# Altium PCB PCB1.PcbDoc (part 4 of 4)
Units mm, origin at the board's own origin, x right, y up, seen from the top; angles counter-clockwise.
Board outline 100.03 x 99.98 mm, 4 copper layers (Top Layer, Layer 2, Layer 3, Bottom Layer), stack 0.603 mm thick; 139 components, 135 nets, 1369 pads, 401 vias.
Unrouted connection lines stored in the file: 1.
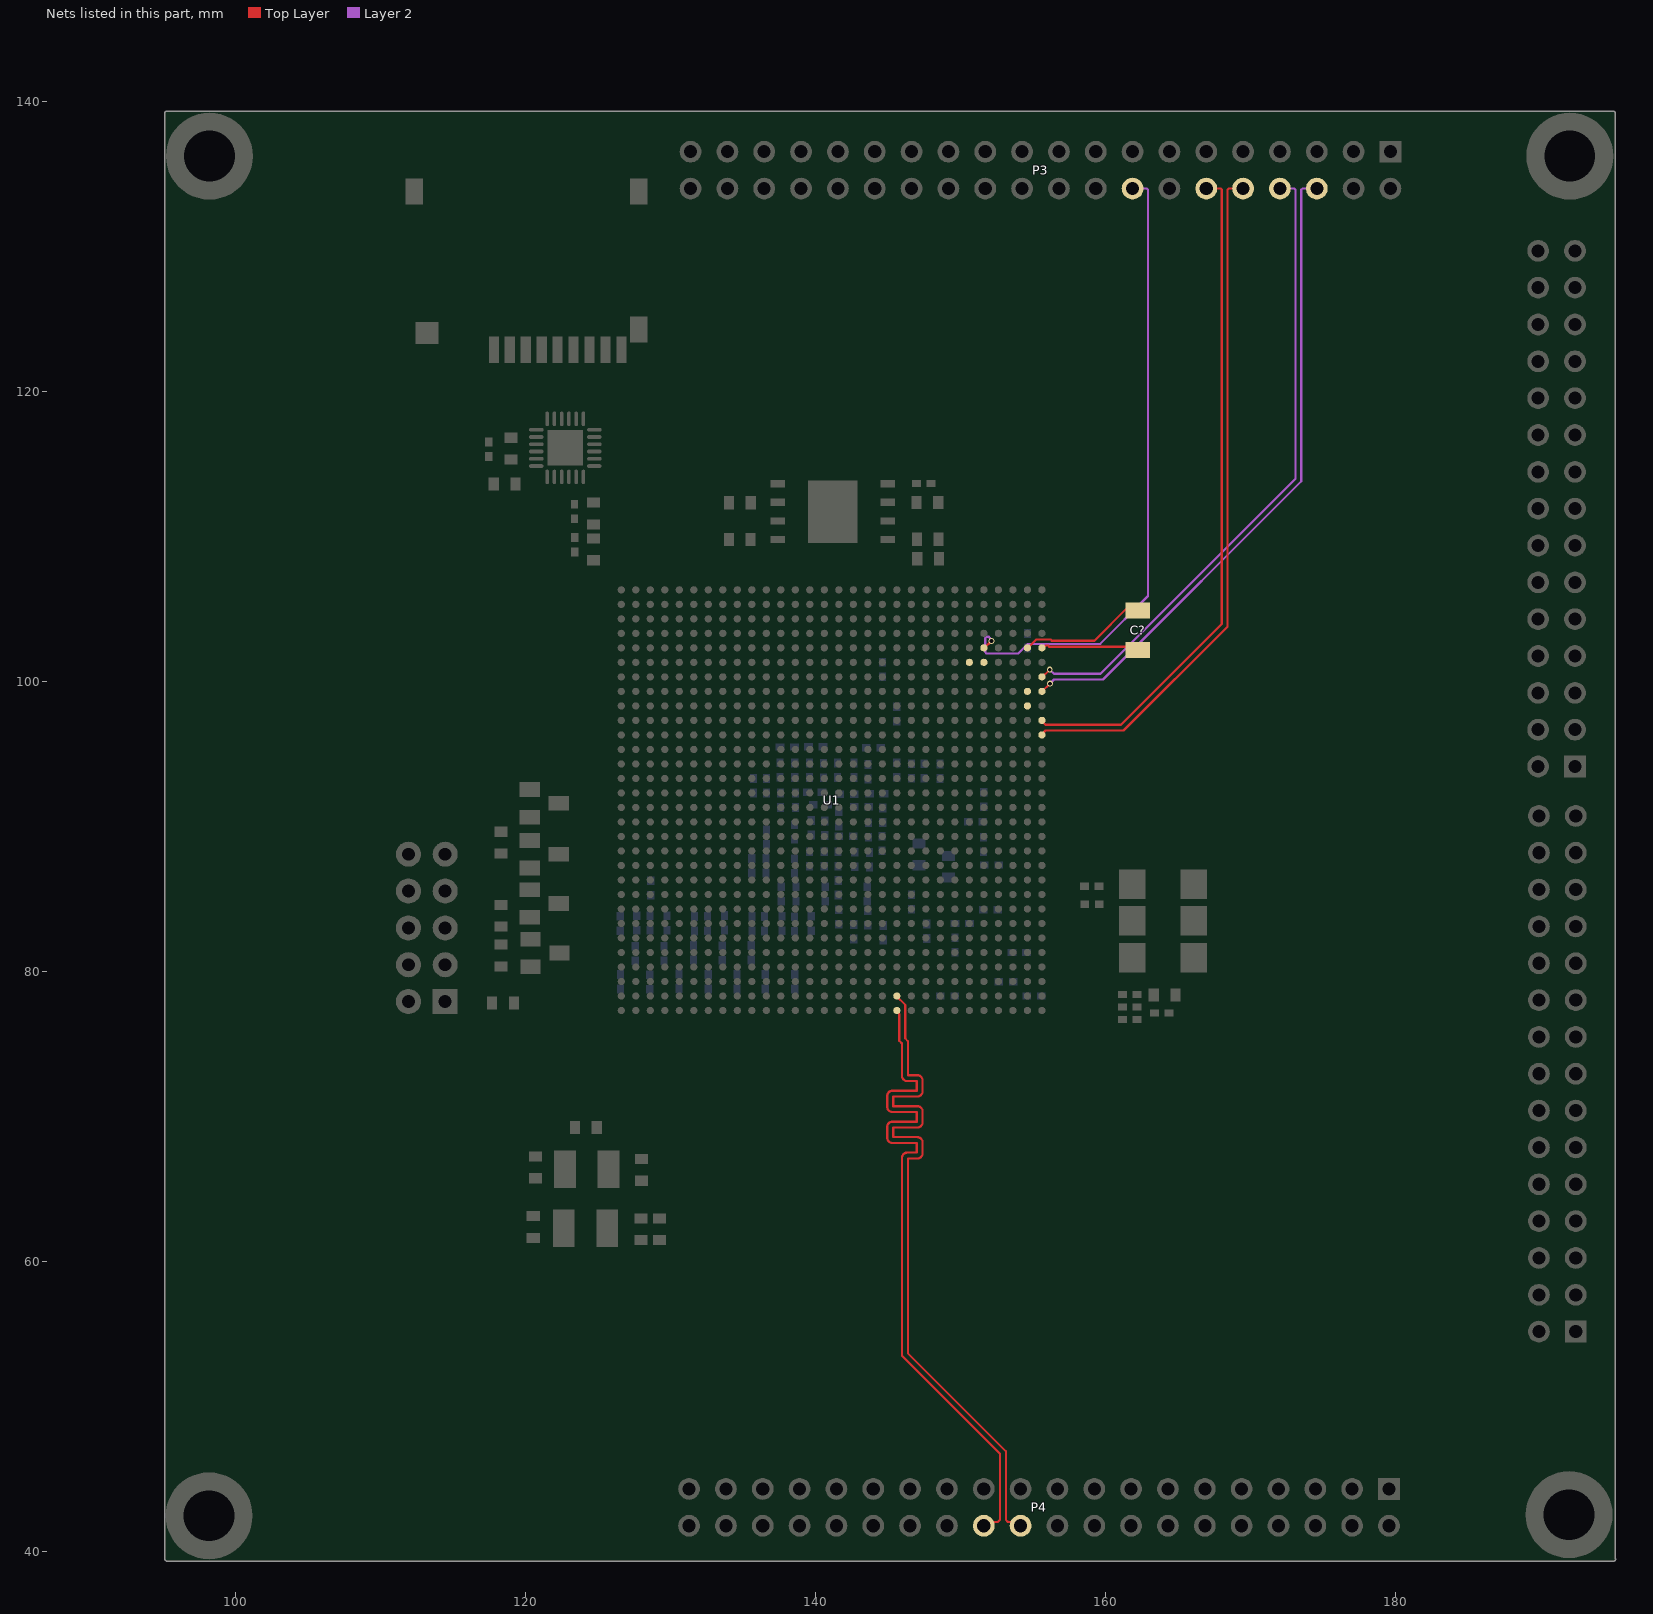
[diagram p6: the nets of this part, all layers, seen from the top]

## Via types
v1: diameter 0.406, hole 0.254, Top Layer to Bottom Layer, 401 vias

## Nets (pads, with @x,y where several pads share a name; then routed paths per layer and width w, separated by ;. In a path a pad name is that pad's centre, name@x,y a point inside that pad or via, vN(x,y) a via of type N, cw(c..) or ccw(c..) an arc to the next point about the centre after c; other vN are vias at no path point) (continued)
X8_P: P3.16 U1.AF26 | length 44.3
  Top Layer w0.152: U1.AF26@151.62,102.314 151.666,102.314 v1(152.146,102.794)
  Layer 2 w0.152: v1(152.146,102.794) 152.146,102.863 152.043,102.966 152.043,102.997 151.954,103.086 151.827,103.086 151.714,102.973 151.714,102.019 151.803,101.93 153.994,101.93 154.655,102.591 159.639,102.591 162.941,105.893 162.941,133.896 162.852,133.985 P3.16@161.874,133.985
X9_N: C?.2 U1.AJ26 | length 8.2
  Top Layer w0.152: U1.AJ26@154.62,102.314 154.663,102.314 155.235,102.886 156.216,102.886 156.301,102.802 159.241,102.802 C?.2@161.582,105.143
X9_P: C?.1 U1.AK26 | length 6.9
  Top Layer w0.152: U1.AK26@155.62,102.314 155.714,102.314 155.88,102.48 156.048,102.48 156.132,102.395 C?.1@162.433,102.395
X10_N: U1.AF25
X10_P: U1.AE25
X11_N: P3.8 U1.AK24 | length 44.4
  Top Layer w0.152: U1.AK24@155.62,100.314 155.661,100.314 v1(156.159,100.813)
  Layer 2 w0.152: v1(156.159,100.813) 156.172,100.813 156.451,100.533 159.664,100.533 173.101,113.97 173.101,133.896 173.012,133.985 P3.8@172.034,133.985
X11_P: P3.6 U1.AK23 | length 45.1
  Top Layer w0.152: U1.AK23@155.62,99.314 155.651,99.314 v1(156.185,99.847)
  Layer 2 w0.152: v1(156.185,99.847) 156.185,99.86 156.451,100.127 159.833,100.127 173.507,113.801 173.507,133.896 173.597,133.985 P3.6@174.574,133.985
X12_N: U1.AJ23
X12_P: U1.AJ22
X13_N: P3.12 U1.AK21 | length 46.5
  Top Layer w0.152: U1.AK21@155.62,97.314 155.62,97.271 155.874,97.017 161.076,97.017 168.021,103.962 168.021,133.896 167.932,133.985 P3.12@166.954,133.985
X13_P: P3.10 U1.AK20 | length 47.1
  Top Layer w0.152: U1.AK20@155.62,96.314 155.62,96.357 155.874,96.611 161.244,96.611 168.427,103.794 168.427,133.896 168.517,133.985 P3.10@169.494,133.985
Y1_N: P4.24 U1.Y1 | length 48.6
  Top Layer w0.152: U1.Y1@145.62,77.314 145.62,77.22 145.786,77.054 145.786,75.219 145.974,75.032 145.974,72.804 ccw(c146.337,72.804) 146.337,72.441 146.99,72.441 146.99,71.78 145.321,71.78 ccw(c145.321,71.417) 144.958,71.417 144.958,70.67 ccw(c145.321,70.67) 145.321,70.307 146.99,70.307 146.99,69.647 145.321,69.647 ccw(c145.321,69.284) 144.958,69.284 144.958,68.537 ccw(c145.321,68.537) 145.321,68.174 146.99,68.174 146.99,67.513 146.337,67.513 ccw(c146.337,67.15) 145.974,67.15 145.974,53.502 152.73,46.745 152.73,42.189 152.582,42.041 151.87,42.041 P4.24@151.613,41.783
Y1_P: P4.22 U1.Y2 | length 49.6
  Top Layer w0.152: U1.Y2@145.62,78.314 145.62,78.271 146.192,77.699 146.192,77.054 146.192,75.388 146.38,75.2 146.38,72.847 147.033,72.847 cw(c147.033,72.484) 147.396,72.484 147.396,71.737 cw(c147.033,71.737) 147.033,71.374 145.364,71.374 145.364,70.714 147.033,70.714 cw(c147.033,70.35) 147.396,70.35 147.396,69.604 cw(c147.033,69.604) 147.033,69.24 145.364,69.24 145.364,68.58 147.033,68.58 cw(c147.033,68.217) 147.396,68.217 147.396,67.47 cw(c147.033,67.47) 147.033,67.107 146.38,67.107 146.38,53.67 153.137,46.914 153.137,42.189 153.285,42.041 153.895,42.041 P4.22@154.153,41.783
pads on no net: J1.7 J1.8 P4.29 P4.31 P4.33 P4.34 P4.35 P4.36 P4.37 P4.38 P4.39 P4.40 U1.A3 U1.A4 U1.A7 U1.A8 U1.A11 U1.A12 U1.A13 U1.A15 U1.A16 U1.A17 U1.A18 U1.A23 U1.AA3 U1.AA4 U1.AA8 U1.AA10 U1.AA11 U1.AA12 U1.AA13 U1.AA15 U1.AA16 U1.AA17 U1.AA18 U1.AA20 U1.AA21 U1.AA22 U1.AA23 U1.AA25 U1.AA26 U1.AA28 U1.AB7 U1.AB8 U1.AB9 U1.AB10 U1.AB12 U1.AB13 U1.AB14 U1.AB15 U1.AB17 U1.AB18 U1.AB19 U1.AB20 U1.AB22 U1.AB23 U1.AB24 U1.AB25 U1.AB27 U1.AB29 U1.AB30 U1.AC4 U1.AC5 U1.AC6 U1.AC7 U1.AC9 U1.AC10 U1.AC11 U1.AC12 U1.AC14 U1.AC15 U1.AC16 U1.AC17 U1.AC19 U1.AC20 U1.AC21 U1.AC22 U1.AC24 U1.AC25 U1.AC26 U1.AC27 U1.AD6 U1.AD8 U1.AD9 U1.AD11 U1.AD12 U1.AD14 U1.AD16 U1.AD17 U1.AD18 U1.AD19 U1.AD21 U1.AD22 U1.AD23 U1.AD24 U1.AD26 U1.AD27 U1.AD28 U1.AD29 U1.AE5 U1.AE6 U1.AE8 U1.AE9 U1.AE11 U1.AE13 U1.AE15 U1.AE16 U1.AE18 U1.AE19 U1.AE20 U1.AE21 U1.AE23 U1.AE24 U1.AE26 U1.AE28 U1.AE29 U1.AF5 U1.AF6 U1.AF7 U1.AF8 U1.AF11 U1.AF12 U1.AF13 U1.AF15 U1.AF17 U1.AF18 U1.AF20 U1.AF21 U1.AF22 U1.AF23 U1.AF28 U1.AG3 U1.AG4 U1.AG5 U1.AG7 U1.AG9 U1.AG10 U1.AG12 U1.AG13 U1.AG14 U1.AG15 U1.AG17 U1.AG18 U1.AG19 U1.AG20 U1.AG22 U1.AG23 U1.AG24 U1.AG25 U1.AG27 U1.AG28 U1.AG29 U1.AH4 U1.AH5 U1.AH6 U1.AH7 U1.AH9 U1.AH10 U1.AH11 U1.AH12 U1.AH14 U1.AH15 U1.AH16 U1.AH17 U1.AH19 U1.AH20 U1.AH21 U1.AH22 U1.AH24 U1.AH25 U1.AH29 U1.AJ4 U1.AJ6 U1.AJ7 U1.AJ8 U1.AJ9 U1.AJ11 U1.AJ12 U1.AJ13 U1.AJ14 U1.AJ16 U1.AJ17 U1.AJ21 U1.AJ24 U1.AJ27 U1.AK4 U1.AK5 U1.AK6 U1.AK8 U1.AK9 U1.AK10 U1.AK11 U1.AK13 U1.AK14 U1.AK25 U1.AK28 U1.B1 U1.B2 U1.B5 U1.B6 U1.B12 U1.B13 U1.B14 U1.B15 U1.B17 U1.B18 U1.B19 U1.B20 U1.B23 U1.B24 U1.B25 U1.B27 U1.C3 U1.C4 U1.C7 U1.C8 U1.C11 U1.C12 U1.C14 U1.C15 U1.C16 U1.C17 U1.C19 U1.C20 U1.C21 U1.C22 U1.C24 U1.C25 U1.C26 U1.C27 U1.C30 U1.D1 U1.D2 U1.D5 U1.D6 U1.D11 U1.D12 U1.D13 U1.D14 U1.D16 U1.D17 U1.D18 U1.D19 U1.D21 U1.D22 U1.D23 U1.D24 U1.D26 U1.D27 U1.D28 U1.D29 U1.E3 U1.E4 U1.E7 U1.E8 U1.E11 U1.E13 U1.E14 U1.E15 U1.E16 U1.E18 U1.E19 U1.E20 U1.E21 U1.E23 U1.E24 U1.E25 U1.E26 U1.E28 U1.F1 U1.F2 U1.F5 U1.F6 U1.F11 U1.F12 U1.F13 U1.F15 U1.F16 U1.F17 U1.F18 U1.F20 U1.F21 U1.F22 U1.F23 U1.F25 U1.F26 U1.F27 U1.F28 U1.F30 U1.G3 U1.G4 U1.G7 U1.G8 U1.G12 U1.G13 U1.G14 U1.G15 U1.G17 U1.G18 U1.G19 U1.G20 U1.G22 U1.G23 U1.G24 U1.G25 U1.G27 U1.G28 U1.G29 U1.G30 U1.H1 U1.H2 U1.H5 U1.H6 U1.H11 U1.H12 U1.H14 U1.H15 U1.H16 U1.H17 U1.H19 U1.H20 U1.H21 U1.H22 U1.H24 U1.H25 U1.H26 U1.H27 U1.H29 U1.H30 U1.J3 U1.J4 U1.J7 U1.J8 U1.J11 U1.J12 U1.J13 U1.J14 U1.J16 U1.J17 U1.J18 U1.J19 U1.J21 U1.J22 U1.J23 U1.J24 U1.J26 U1.J27 U1.J28 U1.J29 U1.K1 U1.K2 U1.K5 U1.K6 U1.K11 U1.K13 U1.K14 U1.K15 U1.K16 U1.K18 U1.K19 U1.K20 U1.K21 U1.K23 U1.K24 U1.K25 U1.K26 U1.K28 U1.K29 U1.K30 U1.L3 U1.L4 U1.L7 U1.L8 U1.L11 U1.L12 U1.L13 U1.L15 U1.L16 U1.L17 U1.L18 U1.L20 U1.L21 U1.L22 U1.L23 U1.L25 U1.L26 U1.L27 U1.L28 U1.L30 U1.M1 U1.M2 U1.M5 U1.M6 U1.M19 U1.M20 U1.M22 U1.M23 U1.M24 U1.M25 U1.M27 U1.M28 U1.M29 U1.M30 U1.N3 U1.N4 U1.N7 U1.N8 U1.N19 U1.N20 U1.N21 U1.N22 U1.N24 U1.N25 U1.N26 U1.N27 U1.N29 U1.N30 U1.P5 U1.P6 U1.P19 U1.P21 U1.P22 U1.P23 U1.P26 U1.P27 U1.P28 U1.P29 U1.R7 U1.R8 U1.R15 U1.R19 U1.R24 U1.R26 U1.R28 U1.R29 U1.R30 U1.T5 U1.T6 U1.T14 U1.T20 U1.T21 U1.T22 U1.T23 U1.T25 U1.T26 U1.T27 U1.T28 U1.T30 U1.U7 U1.U8 U1.U20 U1.U22 U1.U23 U1.U24 U1.U25 U1.U27 U1.U28 U1.V5 U1.V6 U1.V19 U1.V20 U1.V21 U1.V22 U1.V24 U1.V25 U1.V26 U1.V27 U1.V29 U1.V30 U1.W3 U1.W4 U1.W7 U1.W8 U1.W19 U1.W21 U1.W22 U1.W23 U1.W24 U1.W26 U1.W27 U1.W28 U1.Y5 U1.Y6 U1.Y10 U1.Y11 U1.Y14 U1.Y15 U1.Y16 U1.Y18 U1.Y19 U1.Y20 U1.Y21 U1.Y23 U1.Y24 U1.Y25 U1.Y26 U1.Y28 U2.9 U3.8 U3.10 U3.12 U3.13 U3.14 U3.15 X1.2

## Polygon pours and split planes (outlines as drawn)
no net on Layer 3 "Layer 3-No Net" (solid, pour order 97): 95.25,139.192 95.25,39.497 95.26,39.477 95.28,39.456 95.301,39.446 195.047,39.446 195.072,39.472 195.067,39.487 195.047,39.548 195.047,139.192 195.021,139.218 111.481,139.218 111.481,135.026 101.93,135.026 101.93,139.218 95.275,139.218
DIMM_VCCO on Layer 3 "Layer 3-DIMM_VCCO" (solid, pour order 85): 195.123,123.546 195.123,130.759 127.991,130.759 125.578,128.346 125.578,124.409 132.029,124.409 132.893,123.546
MGTAVCC on Layer 3 "Layer 3-MGTAVCC" (solid, pour order 78): 126.642,82.683 126.136,82.177 126.136,68.885 169.799,68.885 177.47,76.556 195.148,76.556 195.148,69.418 195.097,69.367 195.072,69.393 179.426,69.393 176.327,66.294 124.485,66.294 123.825,66.954 123.825,81.458 125.73,83.363 126.659,83.363
MGTAVTT on Layer 3 "Layer 3-MGTAVTT" (solid, pour order 77): 145.644,78.334 145.644,75.59 145.618,75.565 162.966,75.565 171.501,84.099 195.123,84.099 195.123,76.937 195.021,76.835 177.292,76.835 169.57,69.113 126.365,69.113 126.365,81.218
no net on Layer 3 "Layer 3-No Net 1" (solid, pour order 76): 145.644,78.334
+1.5V on Layer 3 "Layer 3-+1.5V" (solid, pour order 75): 149.835,92.024 157.734,92.024 157.759,92.05 195.123,92.05 195.097,92.024 195.097,84.404 149.835,84.404
+1.0V on Layer 3 "Layer 3-+1.0V" (solid, pour order 74): 145.459,95.301 163.398,95.301 163.424,95.326 182.88,95.326 187.858,100.305 195.072,100.305 195.072,92.888 188.57,92.888 188.544,92.913 187.909,92.278 145.434,92.278
VADJ on Layer 3 "Layer 3-VADJ" (solid, pour order 72): 150.419,107.163 150.419,113.208 152.705,115.494 195.123,115.494 195.123,108.204 157.378,108.204 155.626,106.451 155.626,105.816 151.765,105.816
+3.3V on Layer 3 "Layer 3-+3.3V" (solid, pour order 71): 133.579,106.909 133.604,106.934 133.604,123.215 133.68,123.292 194.996,123.292 194.996,115.824 145.618,115.824 145.618,107.198 145.355,106.934 133.579,106.934
DIMM_VCCO on Layer 3 "Layer 3-DIMM_VCCO 1" (solid, pour order 70): 125.527,107.29 125.527,85.293 136.423,85.293 136.423,95.936 136.398,95.961 133.375,95.961 133.375,107.29
+1.5V on Layer 3 "Layer 3-+1.5V 1" (solid, pour order 69): 145.923,91.999 145.923,75.768 156.337,75.768 156.337,91.999
VADJ on Layer 3 "Layer 3-VADJ 1" (solid, pour order 68): 144.882,96.596 156.413,96.596 156.413,107.239 145.847,107.239 145.847,106.782 145.847,96.114
+3.3V on Layer 3 "Layer 3-+3.3V 1" (solid, pour order 67): 133.579,107.239 133.579,96.139 145.644,96.139 145.644,107.239
+1.8V on Layer 3 "Layer 3-+1.8V" (solid, pour order 66): 138.735,88.443 138.735,89.23 138.684,89.281 138.709,89.306 143.637,89.306 143.637,91.313 145.72,91.313 145.72,85.344 143.815,85.344 143.815,88.367 138.811,88.367
no net on Layer 3 "Layer 3-No Net 2" (solid, pour order 65): 138.684,89.281
+1.0V on Layer 3 "Layer 3-+1.0V 1" (solid, pour order 64): 136.576,95.301 136.576,85.344 143.662,85.344 143.637,85.369 143.637,88.316 141.63,88.316 138.608,88.316 138.608,92.278 145.618,92.278 145.644,92.304 145.644,95.301
MGTAVCC on Layer 3 "Layer 3-MGTAVCC 1" (solid, pour order 63): 126.314,83.363 126.314,82.321 140.589,82.321 140.564,82.347 140.564,83.337 126.695,83.337 126.67,83.363
MGTAVTT on Layer 3 "Layer 3-MGTAVTT 1" (solid, pour order 62): 126.289,78.359 126.263,78.334 145.644,78.334 145.644,82.22 126.289,82.22
no net on Layer 2 "Layer 2-No Net" (solid, pour order 99): 95.25,139.192 95.25,39.497 95.26,39.477 95.28,39.456 95.301,39.446 195.047,39.446 195.072,39.472 195.067,39.487 195.047,39.548 195.047,139.192 195.021,139.218 105.226,139.218 95.275,139.218
GND on Layer 2 "Layer 2-GND" (solid, pour order 91): 95.174,139.319 101.6,139.319 101.6,134.925 101.829,134.696 112.293,134.696 112.522,134.925 112.522,139.319 195.148,139.319 195.148,39.37 95.174,39.37
GND on Top Layer "Top Layer-GND" (solid, remove dead copper, pour order 93): 95.25,139.192 95.25,39.497 95.26,39.477 95.28,39.456 95.301,39.446 195.047,39.446 195.072,39.472 195.067,39.487 195.047,39.548 195.047,139.192 195.021,139.218 111.481,139.218 111.481,135.026 101.93,135.026 101.93,139.218 95.275,139.218
GND on Bottom Layer "Bottom Layer-GND" (solid, pour order 95): 95.25,139.192 95.25,39.497 95.26,39.477 95.28,39.456 95.301,39.446 195.047,39.446 195.072,39.472 195.067,39.487 195.047,39.548 195.047,139.192 195.021,139.218 111.481,139.218 111.481,135.026 101.93,135.026 101.93,139.218 95.275,139.218

## Other copper
Top Layer:
  pour cut-out: 160.731,87.351 160.731,79.654 160.757,79.629 167.234,79.629 167.259,79.604 167.259,87.351
  pour cut-out: 137.236,114.706 137.236,108.737 145.186,108.737 145.186,114.681 137.262,114.681
  pour cut-out: 120.167,118.72 120.167,112.852 125.374,112.852 125.4,112.878 125.4,118.694 125.374,118.72
  pour cut-out: 125.4,107.544 125.273,107.417 125.273,75.895 156.972,75.895 156.972,107.747 152.476,107.747
  pour cut-out: 125.4,107.544
  text "1" at 102.845,135.839 h2
Layer 2:
  pour cut-out: 101.93,139.218 101.93,135.026 112.217,135.026 112.217,139.218
  pour cut-out: 91.059,143.231 89.052,141.224 91.008,143.18
  pour cut-out: 99.035,142.596
  text "2" at 104.75,135.941 h2
Layer 3:
  rectangle net DIMM_VCCO: 126.467,107.01 133.375,125.095
  pour cut-out: 107.34,136.652
  text "3" at 107.366,135.941 h2
Bottom Layer:
  pour cut-out: 125.298,107.594 125.298,100.127 125.273,100.101 125.298,100.076 125.298,76.073 125.324,76.048 156.947,76.048 156.947,107.42 157.091,107.564 157.06,107.594 125.425,107.594 125.324,107.696
  text "4" at 109.499,135.89 h2

## Silkscreen, mask and mechanical layers (free items; w line width, h text height)
Top Overlay:
  lines w0.254: 130.023,45.593 130.023,58.395 ; 130.023,51.994 180.746,51.994 ; 130.023,58.522 180.797,58.522 180.797,45.568 ; 130.124,128.118 180.848,128.118 ; 130.124,132.715 130.124,123.317 130.2,123.241 180.899,123.241 180.924,123.266 180.924,132.715 ; 132.537,40.564 132.537,58.496 ; 132.639,123.292 132.639,132.715 ; 135.103,40.589 135.103,58.42 ; 135.179,123.342 135.179,137.744 ; 137.643,40.589 137.643,58.471 ; 137.744,123.292 137.744,132.715 ; 140.183,40.615 140.183,58.496 ; 140.284,123.317 140.284,137.77 ; 142.748,40.64 142.748,58.522 ; 142.799,123.368 142.799,132.69 ; 145.288,40.615 145.288,58.496 ; 145.39,123.292 145.39,137.719 ; 147.803,40.589 147.803,58.471 ; 147.904,123.241 147.904,132.715 ; 150.368,40.589 150.368,58.471 ; 150.495,123.292 150.495,137.668 ; 152.959,40.589 152.959,58.471 ; 152.959,123.266 152.959,132.69 ; 155.423,40.564 155.423,58.445 ; 155.524,123.266 155.524,137.795 ; 157.963,40.538 157.963,58.42 ; 158.064,123.368 158.064,132.715 ; 160.452,40.64 160.452,58.522 ; 160.655,123.419 160.655,137.744 ; 163.068,40.64 163.068,58.522 ; 163.144,123.342 163.144,132.715 ; 165.532,40.615 165.532,58.496 ; 165.659,123.266 165.659,137.719 ; 168.123,40.589 168.123,58.471 ; 168.199,123.368 168.199,132.715 ; 170.688,40.564 170.688,58.445 ; 170.764,123.317 170.764,137.719 ; 173.279,40.615 173.279,58.496 ; 173.304,123.419 173.304,132.69 ; 175.768,40.615 175.768,58.496 ; 175.793,123.419 175.793,137.744 ; 178.283,40.615 178.283,58.496 ; 178.384,123.292 178.384,132.715 ; 182.575,69.139 193.675,69.139 ; 182.575,123.393 193.573,123.393 ; 182.626,108.179 193.548,108.179 ; 182.651,91.999 188.62,91.999 ; 182.651,92.862 188.57,92.862 188.57,92.05 ; 182.677,84.328 193.624,84.328 ; 182.702,61.595 193.599,61.595 ; 182.702,76.86 193.573,76.86 ; 182.702,100.482 188.646,100.482 193.624,100.482 ; 182.702,115.697 193.573,115.697 ; 185.585,53.899 185.585,130.962 ; 188.57,130.962 182.601,130.962 182.55,130.912 182.55,53.899 188.62,53.899 ; 193.65,92.05 193.65,92.862
  text "AK29P" at 169.088,132.715 h1 r270
  text "AK15N" at 174.092,132.715 h1 r270
  text "AH30P" at 161.392,132.69 h1 r270
  text "AH30N" at 163.855,132.69 h1 r270
  text "AK30N" at 166.446,132.69 h1 r270
  text "AK16P" at 171.501,132.69 h1 r270
  text "AK18N" at 176.581,132.69 h1 r270
  text "AA30N" at 158.877,132.664 h1 r270
  text "AJ18P" at 179.172,132.664 h1 r270
  text "Y30P" at 156.21,132.385 h1 r270
  text "A22N" at 146.177,132.334 h1 r270
  text "B22P" at 148.742,132.309 h1 r270
  text "U30N" at 151.206,132.309 h1 r270
  text "U29P" at 153.848,132.283 h1 r270
  text "A26N" at 135.966,132.207 h1 r270
  text "A21N" at 143.739,132.207 h1 r270
  text "E30N" at 130.886,132.182 h1 r270
  text "A25P" at 138.633,132.156 h1 r270
  text "E30P" at 133.452,132.131 h1 r270
  text "A20P" at 140.843,132.131 h1 r270
  text "B1678" at 183.337,130.683 h1.52 r270
  text "DIMM" at 186.461,129.819 h1.52 r270
  text "AC30N" at 143.637,128.118 h1 r270
  text "AE30P" at 146.101,128.092 h1 r270
  text "AF30N" at 148.768,128.092 h1 r270
  text "AJ28P" at 151.257,128.092 h1 r270
  text "AJ29N" at 153.772,128.092 h1 r270
  text "AK20P" at 169.113,128.092 h1 r270
  text "AA27P" at 136.017,128.067 h1 r270
  text "AB28N" at 138.608,128.041 h1 r270
  text "AC29P" at 140.995,128.041 h1 r270
  text "AK23P" at 174.117,128.016 h1 r270
  text "AH26N" at 158.877,127.991 h1 r270
  text "AF27N" at 163.906,127.991 h1 r270
  text "AH27P" at 156.261,127.965 h1 r270
  text "AK19N" at 176.632,127.965 h1 r270
  text "AJ19P" at 179.095,127.965 h1 r270
  text "AK21N" at 166.497,127.94 h1 r270
  text "AK24N" at 171.552,127.94 h1 r270
  text "AF26P" at 161.417,127.914 h1 r270
  text "W29P" at 130.835,127.559 h1 r270
  text "Y29N" at 133.375,127.533 h1 r270
  text "B1415" at 183.312,122.885 h1.52 r270
  text "3.3V" at 186.334,122.072 h1.52 r270
  text "B1213" at 183.312,115.214 h1.52 r270
  text "VADJ" at 186.334,114.706 h1.52 r270
  text "1.8V" at 186.385,106.807 h1.52 r270
  text "AUX" at 183.337,106.172 h1.52 r270
  text "CORE" at 183.388,99.517 h1.52 r270
  text "1.0V" at 186.334,99.187 h1.52 r270
  text "B3234" at 183.286,91.77 h1.52 r270
  text "1.5V" at 186.334,90.602 h1.52 r270
  text "AVTT" at 186.334,83.261 h1.52 r270
  text "AVCC" at 186.334,75.692 h1.52 r270
  text "杭州涅普科技有限责任公司" at 177.546,72.695 h3 r90
  text "VTTR" at 186.36,68.047 h1.52 r270
  text "AE4P" at 166.192,56.769 h1 r270
  text "AK3N" at 176.53,56.769 h1 r270
  text "AD3N" at 163.83,56.693 h1 r270
  text "AE3N" at 168.808,56.693 h1 r270
  text "AJ3P" at 179.121,56.642 h1 r270
  text "R3N" at 146.101,56.617 h1 r270
  text "AD4P" at 161.239,56.617 h1 r270
  text "AF2N" at 173.914,56.591 h1 r270
  text "R4P" at 148.539,56.566 h1 r270
  text "AF3P" at 171.374,56.566 h1 r270
  text "T2P" at 153.721,56.54 h1 r270
  text "T1N" at 151.105,56.515 h1 r270
  text "U3N" at 156.21,56.439 h1 r270
  text "U4P" at 158.725,56.337 h1 r270
  text "AH1N" at 171.552,50.444 h1 r270
  text "AG2P" at 174.117,50.419 h1 r270
  text "AK1P" at 179.222,50.394 h1 r270
  text "AF1N" at 169.037,50.343 h1 r270
  text "AJ1N" at 176.454,50.317 h1 r270
  text "AD2P" at 163.957,50.292 h1 r270
  text "AE1P" at 166.345,50.292 h1 r270
  text "AC2P" at 158.648,50.267 h1 r270
  text "AD1N" at 161.315,50.241 h1 r270
  text "AC1N" at 156.108,50.216 h1 r270
  text "V1N" at 146.05,49.987 h1 r270
  text "Y1N" at 151.13,49.936 h1 r270
  text "V2P" at 148.59,49.86 h1 r270
  text "Y2P" at 153.645,49.835 h1 r270
Bottom Solder:
  text "杭州涅普科技有限责任公司" at 104.775,128.245 h3 r270
Mechanical 1:
  the board outline again, w1.2
Drill Drawing:
  lines w0.254: 95.275,39.497 95.301,39.472 195.047,39.472 195.021,39.497 195.021,139.192 95.275,139.192 95.275,39.497

## Text inside footprints (layer, text, board x,y; h text height)
CARD1: Mechanical 11 "9" at 126.631,122.618 h0.64 r180; Mechanical 11 "1" at 117.831,122.618 h0.64 r180; Mechanical 11 "8" at 125.531,122.618 h0.64 r180; Mechanical 11 "3" at 120.03,122.618 h0.64 r180; Mechanical 11 "2" at 118.931,122.618 h0.64 r180; Mechanical 11 "7" at 124.431,122.618 h0.64 r180; Mechanical 11 "5" at 122.231,122.618 h0.64 r180; Mechanical 11 "4" at 121.131,122.618 h0.64 r180; Mechanical 11 "11" at 127.831,123.765 h0.64 r180; Mechanical 11 "6" at 123.331,122.618 h0.64 r180; Mechanical 11 "10" at 113.231,123.515 h0.64 r180; Mechanical 11 "13" at 112.33,133.264 h0.64 r180; Mechanical 11 "12" at 127.831,133.264 h0.64 r180
D1: Mechanical 11 "2" at 120.615,80.33 h0.64 r180; Mechanical 11 "1" at 120.615,82.23 h0.64 r180; Mechanical 11 "3" at 122.606,81.28 h0.64 r180; Mechanical 12 "sot-23" at 122.994,84.074 h0.64 r180; Mechanical 12 "78.39" at 118.493,78.64 h0.64 r180; Mechanical 12 "1.99" at 115.089,78.64 h0.64 r180; Mechanical 12 "74.81" at 119.121,81.47 h0.64 r180; Mechanical 12 "1.9" at 115.718,81.47 h0.64 r180
D2: Mechanical 11 "2" at 120.564,87.137 h0.64 r180; Mechanical 11 "1" at 120.564,89.037 h0.64 r180; Mechanical 11 "3" at 122.555,88.087 h0.64 r180; Mechanical 12 "sot-23" at 122.943,90.881 h0.64 r180; Mechanical 12 "78.39" at 118.442,85.448 h0.64 r180; Mechanical 12 "1.99" at 115.039,85.448 h0.64 r180; Mechanical 12 "74.81" at 119.071,88.277 h0.64 r180; Mechanical 12 "1.9" at 115.667,88.277 h0.64 r180
D3: Mechanical 11 "2" at 120.564,83.733 h0.64 r180; Mechanical 11 "1" at 120.564,85.634 h0.64 r180; Mechanical 11 "3" at 122.555,84.684 h0.64 r180; Mechanical 12 "sot-23" at 122.943,87.477 h0.64 r180; Mechanical 12 "78.39" at 118.442,82.044 h0.64 r180; Mechanical 12 "1.99" at 115.039,82.044 h0.64 r180; Mechanical 12 "74.81" at 119.071,84.874 h0.64 r180; Mechanical 12 "1.9" at 115.667,84.874 h0.64 r180
D4: Mechanical 11 "2" at 120.564,90.642 h0.64 r180; Mechanical 11 "1" at 120.564,92.542 h0.64 r180; Mechanical 11 "3" at 122.555,91.592 h0.64 r180; Mechanical 12 "sot-23" at 122.943,94.386 h0.64 r180; Mechanical 12 "78.39" at 118.442,88.953 h0.64 r180; Mechanical 12 "1.99" at 115.039,88.953 h0.64 r180; Mechanical 12 "74.81" at 119.071,91.783 h0.64 r180; Mechanical 12 "1.9" at 115.667,91.783 h0.64 r180
J1: Mechanical 11 "7" at 114.478,85.291 h0.64 r90; Mechanical 11 "8" at 111.938,85.291 h0.64 r90; Mechanical 11 "10" at 111.938,87.575 h0.64 r90; Mechanical 11 "2" at 111.938,77.671 h0.64 r90; Mechanical 11 "6" at 111.938,82.751 h0.64 r90; Mechanical 11 "4" at 111.938,80.211 h0.64 r90; Mechanical 11 "3" at 114.478,80.211 h0.64 r90; Mechanical 11 "5" at 114.478,82.751 h0.64 r90; Mechanical 11 "9" at 114.478,87.831 h0.64 r90; Mechanical 11 "1" at 114.478,77.671 h0.64 r90
U3: Mechanical 11 "23" at 120.758,114.845 h0.64 r90; Mechanical 11 "16" at 122.508,117.595 h0.64 r90; Mechanical 11 "20" at 120.758,116.345 h0.64 r90; Mechanical 11 "22" at 120.758,115.345 h0.64 r90; Mechanical 11 "24" at 120.758,114.345 h0.64 r90; Mechanical 11 "18" at 121.508,117.595 h0.64 r90; Mechanical 11 "19" at 120.758,116.845 h0.64 r90; Mechanical 11 "9" at 124.758,115.599 h0.64 r90; Mechanical 11 "4" at 123.008,113.849 h0.64 r90; Mechanical 11 "5" at 123.508,113.849 h0.64 r90; Mechanical 11 "21" at 120.758,115.845 h0.64 r90; Mechanical 11 "17" at 122.008,117.595 h0.64 r90; Mechanical 11 "11" at 124.758,116.345 h0.64 r90; Mechanical 11 "2" at 122.008,113.849 h0.64 r90; Mechanical 11 "25" at 122.758,115.595 h0.64 r90; Mechanical 11 "6" at 124.008,113.849 h0.64 r90; Mechanical 11 "1" at 121.508,113.849 h0.64 r90; Mechanical 11 "7" at 124.758,114.599 h0.64 r90; Mechanical 11 "3" at 122.508,113.849 h0.64 r90; Mechanical 11 "10" at 124.758,115.845 h0.64 r90; Mechanical 11 "8" at 124.758,115.099 h0.64 r90; Mechanical 11 "15" at 123.008,117.595 h0.64 r90; Mechanical 11 "14" at 123.508,117.595 h0.64 r90; Mechanical 11 "12" at 124.758,116.845 h0.64 r90; Mechanical 11 "13" at 124.008,117.595 h0.64 r90
X1: Mechanical 11 "4" at 161.849,85.522 h0.64 r90; Mechanical 11 "1" at 166.091,80.442 h0.64 r90; Mechanical 11 "5" at 161.849,82.982 h0.64 r90; Mechanical 11 "6" at 161.849,80.442 h0.64 r90; Mechanical 11 "3" at 166.091,85.522 h0.64 r90; Mechanical 11 "2" at 166.091,82.982 h0.64 r90